# Altium PCB 2018_CARTE_SENSORS.PCBDOC
Units mil, origin at the board's own origin, x right, y up, seen from the top; angles counter-clockwise.
Board outline 6889.76 x 1181.1 mil, 4 copper layers (1-TOP, 2-GND, 3-SIGNAL, 4-BOTTOM); 85 components, 74 nets, 293 pads, 95 vias.
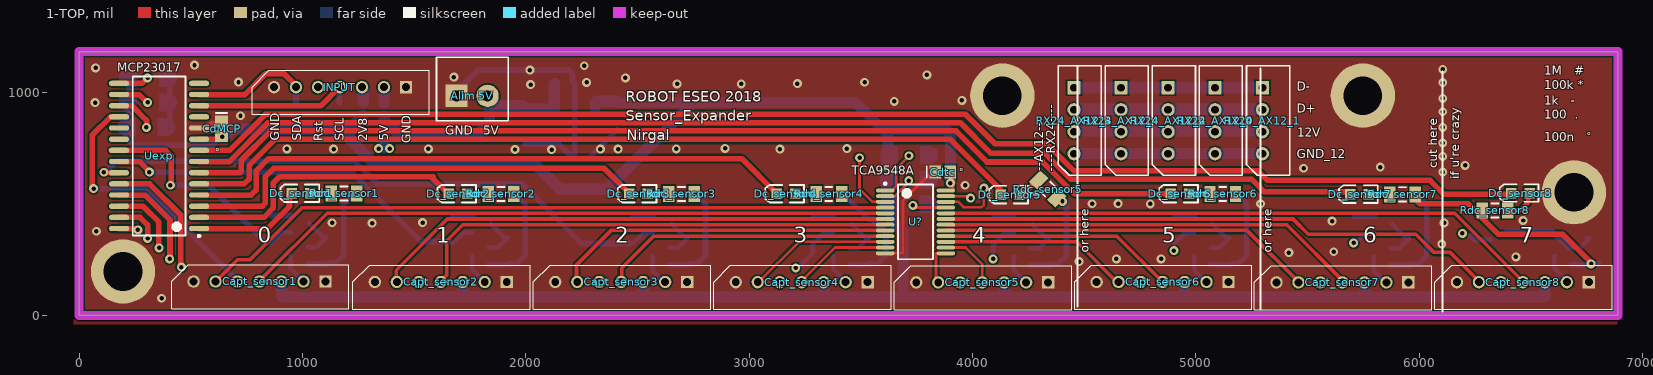
[diagram p0: 1-TOP view]
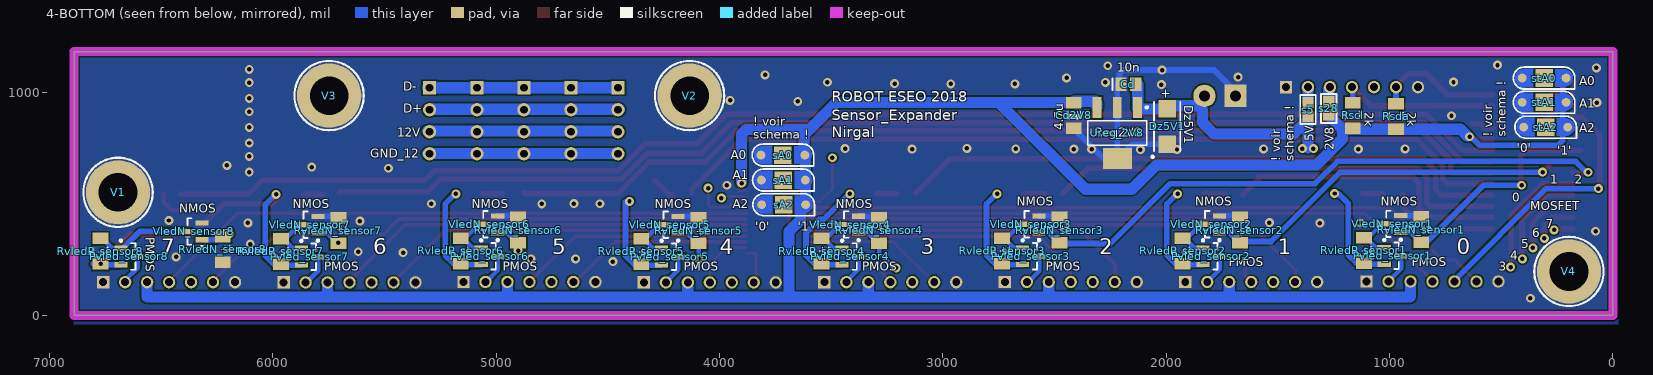
[diagram p1: 4-BOTTOM view, seen from below]
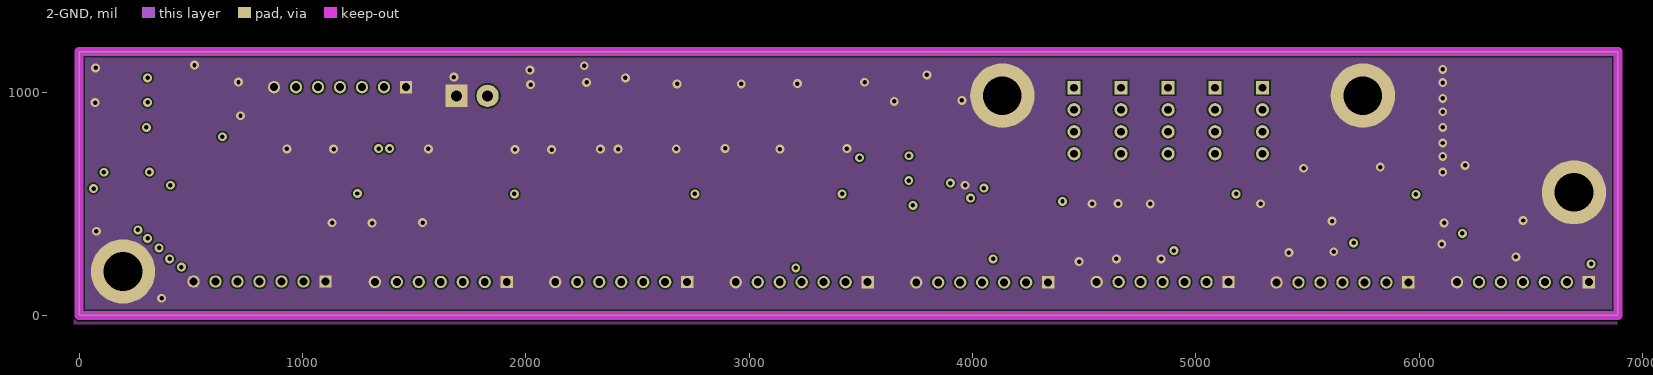
[diagram p2: 2-GND]
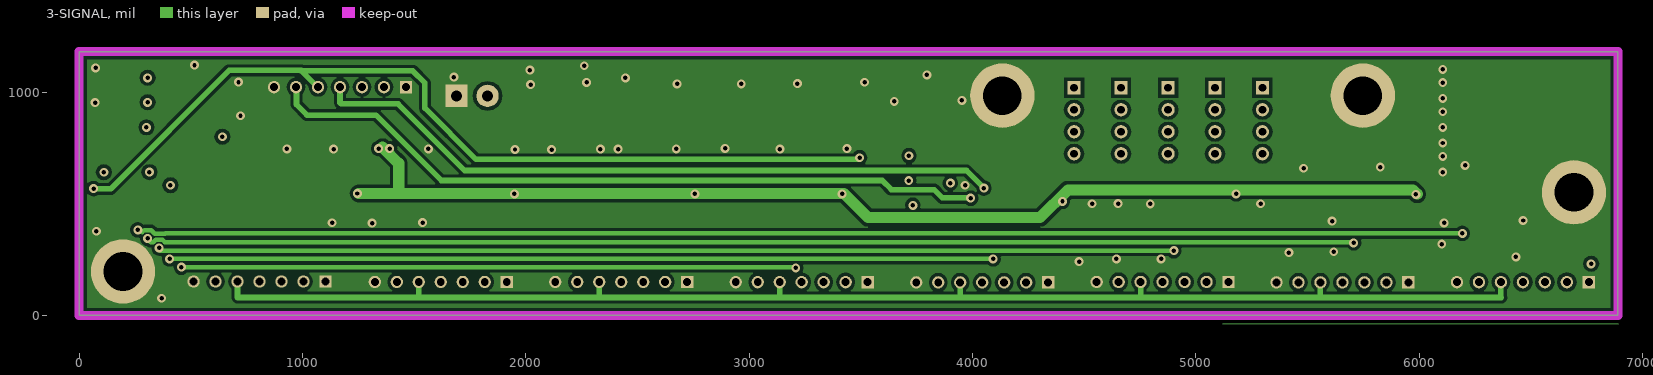
[diagram p3: 3-SIGNAL]
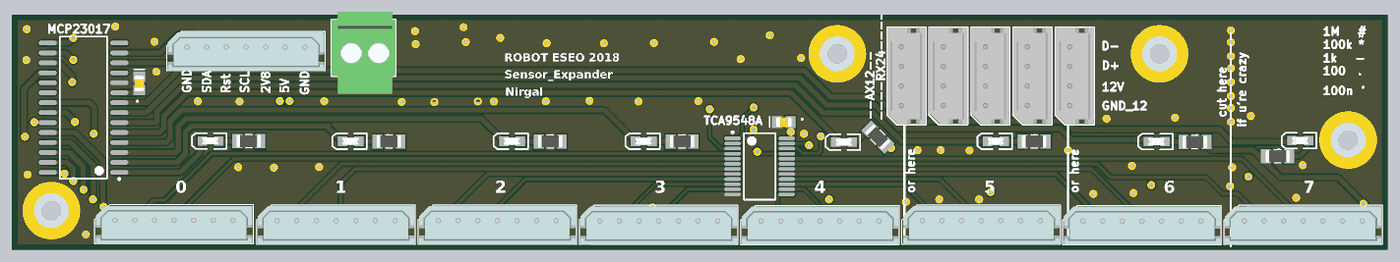
[diagram p4: 3D render of the assembled board from above, using the file's embedded part models]
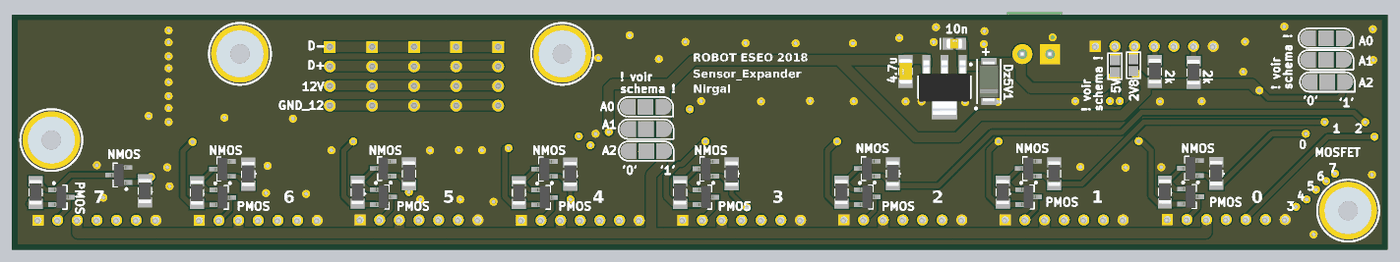
[diagram p5: 3D render of the assembled board from below, using the file's embedded part models]

## Layer stack, top to bottom
Top Solder: solder mask 0.4, Solder Resist, Dk 3.5
1-TOP: signal copper 1.4
Dielectric1: prepreg 12.6, FR-4, Dk 4.8
2-GND: signal copper 1.4
Dielectric2: core 12.6, FR-4, Dk 4.8
3-SIGNAL: signal copper 1.4
Dielectric3: prepreg 12.6, FR-4, Dk 4.8
4-BOTTOM: signal copper 1.4
Bottom Solder: solder mask 0.4, Solder Resist, Dk 3.5

## Board outline
0,0 0,1181.1 6889.76,1181.1 6889.76,0

## Design rules (kind name [scope] priority, off if disabled: settings)
Clearance Clearance_1 [InNamedPolygon('4-BOTTOM') Or  InNamedPolygon('2-SIGNAL') Or  InNamedPolygon('2-24V') Or  InNamedPolygon('3-TOP') Or  InNamedPolygon('3-GND')] p1: gap=15
Clearance [All] p2: gap=7
FabricationTestPointUsage TestPointUsage [All] p1: valid=0 allowmultiple=FALSE
FabricationTestpoint Testpoint [All] p1: side=3 testpointundercomponent=TRUE minsize=40 maxsize=100 preferedsize=60 minholesize=0 maxholesize=40 preferedholesize=32 testpointgrid=1 allowsidetop=TRUE allowsidebottom=TRUE usegrid=TRUE gridtolerance=0.01
PlaneClearance [All] p1: clearance=10
PlaneConnect [All] p1: planeconnectstyle=Direct reliefexpansion=25 reliefentries=4 reliefconductorwidth=12 reliefairgap=15
PolygonConnect [All] p1: connectstyle=Direct reliefconductorwidth=10 reliefentries=4 polygonreliefangle="90 Angle" airgapwidth=10
RoomDefinition sensor8 [InComponentClass('sensor8')] p1: confinementstyle=ConfineIn formatcopy=TRUE lockcomponents=FALSE outline 6063.61,594 6063.61,21 6869.61,21 6869.61,594
RoomDefinition sensor7 [InComponentClass('sensor7')] p2: confinementstyle=ConfineIn formatcopy=TRUE lockcomponents=FALSE outline 5255.61,593 5255.61,20 6061.61,20 6061.61,593
RoomDefinition sensor6 [InComponentClass('sensor6')] p3: confinementstyle=ConfineIn formatcopy=TRUE lockcomponents=FALSE outline 4450.61,595 4450.61,22 5256.61,22 5256.61,595
RoomDefinition sensor5 [InComponentClass('sensor5')] p4: confinementstyle=ConfineIn formatcopy=TRUE lockcomponents=FALSE outline 3642.76,593 3642.76,20 4448.76,20 4448.76,593
RoomDefinition sensor4 [InComponentClass('sensor4')] p5: confinementstyle=ConfineIn formatcopy=TRUE lockcomponents=FALSE outline 2834.61,594 2834.61,21 3640.61,21 3640.61,594
RoomDefinition sensor3 [InComponentClass('sensor3')] p6: confinementstyle=ConfineIn formatcopy=TRUE lockcomponents=FALSE outline 2026.61,595 2026.61,22 2832.61,22 2832.61,595
RoomDefinition sensor2 [InComponentClass('sensor2')] p7: confinementstyle=ConfineIn formatcopy=TRUE lockcomponents=FALSE outline 1218.61,595 1218.61,22 2024.61,22 2024.61,595
RoomDefinition sensor1 [InComponentClass('sensor1')] p8: confinementstyle=ConfineIn formatcopy=TRUE lockcomponents=FALSE outline 407,597 407,24 1213,24 1213,597
RoomDefinition 2018_CARTE_SENSORS [InComponentClass('2018_CARTE_SENSORS')] p9: confinementstyle=ConfineIn formatcopy=TRUE lockcomponents=FALSE outline 7842.14,4998 7401,4998 7401,4948.02 7842.14,4948.02
RoutingLayers RoutingLayers_1 [All] p1: top layer_v5=TRUE mid layer 1_v5=FALSE mid layer 2_v5=FALSE bottom layer_v5=TRUE
RoutingLayers [All] p2: top layer_v5=TRUE mid layer 1_v5=FALSE mid layer 2_v5=FALSE bottom layer_v5=TRUE
RoutingVias [All] p1: holewidth=28 width=50 viastyle="Through Hole" minholewidth=28 minwidth=50 maxholewidth=28 maxwidth=50
SilkToSolderMaskClearance SilkscreenOverComponentPads [IsPad] p1: minsilkscreentomaskgap=10 clearancetoexposedcopper=TRUE
SolderMaskExpansion [All] p1: expansion=0
Width [All] p1: maxlimit=300 minlimit=5 preferedwidth=20
23 further rules are at their usual default settings.

## Classes and differential pairs
channel class sensor: sensor1 sensor2 sensor3 sensor4 sensor5 sensor6 sensor7 sensor8
net class SDA[1..8]: SDA1 SDA2 SDA3 SDA4 SDA5 SDA6 SDA7 SDA8
net class SCL[1..8]: SCL1 SCL2 SCL3 SCL4 SCL5 SCL6 SCL7 SCL8
net class MOSLED[1..8]: MOSLED1 MOSLED2 MOSLED3 MOSLED4 MOSLED5 MOSLED6 MOSLED7 MOSLED8
net class LED[1..8]: LED1 LED2 LED3 LED4 LED5 LED6 LED7 LED8
component class sensor8: Capt_sensor8 Dc_sensor8 Pvled_sensor8 Rdc_sensor8 RvledN_sensor8 RvledP_sensor8 VledN_sensor8
component class sensor7: Capt_sensor7 Dc_sensor7 Pvled_sensor7 Rdc_sensor7 RvledN_sensor7 RvledP_sensor7 VledN_sensor7
component class sensor6: Capt_sensor6 Dc_sensor6 Pvled_sensor6 Rdc_sensor6 RvledN_sensor6 RvledP_sensor6 VledN_sensor6
component class sensor5: Capt_sensor5 Dc_sensor5 Pvled_sensor5 Rdc_sensor5 RvledN_sensor5 RvledP_sensor5 VledN_sensor5
component class sensor4: Capt_sensor4 Dc_sensor4 Pvled_sensor4 Rdc_sensor4 RvledN_sensor4 RvledP_sensor4 VledN_sensor4
component class sensor3: Capt_sensor3 Dc_sensor3 Pvled_sensor3 Rdc_sensor3 RvledN_sensor3 RvledP_sensor3 VledN_sensor3
component class sensor2: Capt_sensor2 Dc_sensor2 Pvled_sensor2 Rdc_sensor2 RvledN_sensor2 RvledP_sensor2 VledN_sensor2
component class sensor1: Capt_sensor1 Dc_sensor1 Pvled_sensor1 Rdc_sensor1 RvledN_sensor1 RvledP_sensor1 VledN_sensor1
component class 2018_CARTE_SENSORS: "Alim 5V" Cd Cd2V8 CdMCP Cdtc Dz5V1 INPUT Rscl Rsda RX24_AX12_0 RX24_AX12_1 RX24_AX12_2 RX24_AX12_3 RX24_AX12_4 s5 s28 sA0 sA1 sA2 stA0 stA1 stA2 U? Uexp Ureg_2V8 V1 V2 V3 V4

## Components (designator, comment, footprint, x,y, rotation, side; value= is the part's Value field where it differs from the comment)
"Alim 5V" "BORNIER_2V_3.5MM" BORNIER_2V_3.5MM 1691,983 r0 top
Capt_sensor1 "BARRETTE7" MOLEX7_2.50MM 807.66,152 r0 top (schematic designator Capt)
Capt_sensor2 "BARRETTE7" MOLEX7_2.50MM 1619.28,150 r0 top (schematic designator Capt)
Capt_sensor3 "BARRETTE7" MOLEX7_2.50MM 2427.28,150 r0 top (schematic designator Capt)
Capt_sensor4 "BARRETTE7" MOLEX7_2.50MM 3235.28,149 r0 top (schematic designator Capt)
Capt_sensor5 "BARRETTE7" MOLEX7_2.50MM 4043.42,148 r0 top (schematic designator Capt)
Capt_sensor6 "BARRETTE7" MOLEX7_2.50MM 4851.28,150 r0 top (schematic designator Capt)
Capt_sensor7 "BARRETTE7" MOLEX7_2.50MM 5656.28,148 r0 top (schematic designator Capt)
Capt_sensor8 "BARRETTE7" MOLEX7_2.50MM 6464.28,149 r0 top (schematic designator Capt)
Cd "10nF" C0805_N 2169,1035 r180 bottom
Cd2V8 "4.7u" C1206_N 2414,896 r90 bottom
CdMCP "100nF" C0805_N 638,836 r270 top
Cdtc "100nF" C0805_N 3866,642 r0 top
Dc_sensor1 "LED" LED_0805 994,547 r180 top (schematic designator Dc)
Dc_sensor2 "LED" LED_0805 1696.61,545 r180 top (schematic designator Dc)
Dc_sensor3 "LED" LED_0805 2504.61,545 r180 top (schematic designator Dc)
Dc_sensor4 "LED" LED_0805 3164.61,545 r180 top (schematic designator Dc)
Dc_sensor5 "LED" LED_0805 4167.76,541 r180 top (schematic designator Dc)
Dc_sensor6 "LED" LED_0805 4928.61,545 r180 top (schematic designator Dc)
Dc_sensor7 "LED" LED_0805 5733.61,543 r180 top (schematic designator Dc)
Dc_sensor8 "LED" LED_0805 6453,548 r180 top (schematic designator Dc)
Dz5V1 "Diode Zener" "SMA Diode" 1996,846 r90 bottom
INPUT "BARRETTE7" MOLEX7_2.50MM 1168,1022 r0 top
Pvled_sensor1 "MOSP" SOT23-3N 986,267 r180 bottom (schematic designator Pvled)
Pvled_sensor2 "MOSP" SOT23-3N 1797.61,265 r180 bottom (schematic designator Pvled)
Pvled_sensor3 "MOSP" SOT23-3N 2605.61,265 r180 bottom (schematic designator Pvled)
Pvled_sensor4 "MOSP" SOT23-3N 3413.61,264 r180 bottom (schematic designator Pvled)
Pvled_sensor5 "MOSP" SOT23-3N 4221.76,263 r180 bottom (schematic designator Pvled)
Pvled_sensor6 "MOSP" SOT23-3N 5029.61,265 r180 bottom (schematic designator Pvled)
Pvled_sensor7 "MOSP" SOT23-3N 5834.61,263 r180 bottom (schematic designator Pvled)
Pvled_sensor8 "MOSP" SOT23-3N 6642.61,264 r180 bottom (schematic designator Pvled)
Rdc_sensor1 "1k" R1206_N 1186,546 r180 top (schematic designator Rdc)
Rdc_sensor2 "1k" R1206_N 1888.61,544 r180 top (schematic designator Rdc)
Rdc_sensor3 "1k" R1206_N 2696.61,544 r180 top (schematic designator Rdc)
Rdc_sensor4 "1k" R1206_N 3356.61,544 r180 top (schematic designator Rdc)
Rdc_sensor5 "1k" R1206_N 4337,566 r135 top (schematic designator Rdc)
Rdc_sensor6 "1k" R1206_N 5120.61,544 r180 top (schematic designator Rdc)
Rdc_sensor7 "1k" R1206_N 5925.61,542 r180 top (schematic designator Rdc)
Rdc_sensor8 "1k" R1206_N 6339,470 r0 top (schematic designator Rdc)
Rscl "2k" R1206_N 1165,896 r90 bottom
Rsda "2k" R1206_N 971,891 r90 bottom
RvledN_sensor1 "10k" R1206_N 858,384 r90 bottom (schematic designator RvledN)
RvledN_sensor2 "10k" R1206_N 1669.61,382 r90 bottom (schematic designator RvledN)
RvledN_sensor3 "10k" R1206_N 2477.61,382 r90 bottom (schematic designator RvledN)
RvledN_sensor4 "10k" R1206_N 3285.61,381 r90 bottom (schematic designator RvledN)
RvledN_sensor5 "10k" R1206_N 4093.76,380 r90 bottom (schematic designator RvledN)
RvledN_sensor6 "10k" R1206_N 4901.61,382 r90 bottom (schematic designator RvledN)
RvledN_sensor7 "10k" R1206_N 5706.61,380 r90 bottom (schematic designator RvledN)
RvledN_sensor8 "10k" R1206_N 6224,296 r270 bottom (schematic designator RvledN)
RvledP_sensor1 "10k" R1206_N 1115,291 r90 bottom (schematic designator RvledP)
RvledP_sensor2 "10k" R1206_N 1926.61,289 r90 bottom (schematic designator RvledP)
RvledP_sensor3 "10k" R1206_N 2734.61,289 r90 bottom (schematic designator RvledP)
RvledP_sensor4 "10k" R1206_N 3542.61,288 r90 bottom (schematic designator RvledP)
RvledP_sensor5 "10k" R1206_N 4350.76,287 r90 bottom (schematic designator RvledP)
RvledP_sensor6 "10k" R1206_N 5158.61,289 r90 bottom (schematic designator RvledP)
RvledP_sensor7 "10k" R1206_N 5963.61,287 r90 bottom (schematic designator RvledP)
RvledP_sensor8 "10k" R1206_N 6771.61,288 r90 bottom (schematic designator RvledP)
RX24_AX12_0 "MOLEX 22-03-5045" MOLEX4_2.5MM 5086,723.98 r90 top
RX24_AX12_1 "MOLEX 22-03-5045" MOLEX4_2.5MM 5298,723.98 r90 top
RX24_AX12_2 "MOLEX 22-03-5045" MOLEX4_2.5MM 4876,723.98 r90 top
RX24_AX12_3 "MOLEX 22-03-5045" MOLEX4_2.5MM 4455,723.98 r90 top
RX24_AX12_4 "MOLEX 22-03-5045" MOLEX4_2.5MM 4665,723.98 r90 top
s5 "Goutte Strap_2" "Goutte Strap_2 Pads_Clearance 0.254mm" 1365,892 r90 bottom
s28 "Goutte Strap_2" "Goutte Strap_2 Pads_Clearance 0.254mm" 1272,897 r90 bottom
sA0 "Goutte Strap_3" "Goutte Strap_3 PADS" 3716,718 r0 bottom
sA1 "Goutte Strap_3" "Goutte Strap_3 PADS" 3714,606 r0 bottom
sA2 "Goutte Strap_3" "Goutte Strap_3 PADS" 3713,496 r0 bottom
stA0 "Goutte Strap_3" "Goutte Strap_3 PADS" 308,1063 r0 bottom
stA1 "Goutte Strap_3" "Goutte Strap_3 PADS" 308,954 r0 bottom
stA2 "Goutte Strap_3" "Goutte Strap_3 PADS" 301,843 r0 bottom
U? "TCA9548A" DB24_N 3745,419 r0 top
Uexp "MCP23017-E/SO" SOIC-SO28_N 358,714 r180 top
Ureg_2V8 "TLV1117LV28DCYR" SOT223-4N 2219,817 r270 bottom
V1 "Entretoise WURTH CMS" ENTRETOISE_CMS 6692.91,551.18 r180 bottom
V2 "Entretoise WURTH CMS" ENTRETOISE_CMS 4133.86,984.25 r180 bottom
V3 "Entretoise WURTH CMS" ENTRETOISE_CMS 5748.03,984.25 r180 bottom
V4 "Entretoise WURTH CMS" ENTRETOISE_CMS 196.85,196.85 r180 bottom
VledN_sensor1 "MOSN" SOT23-3N 987,410 r0 bottom (schematic designator VledN)
VledN_sensor2 "MOSN" SOT23-3N 1798.61,408 r0 bottom (schematic designator VledN)
VledN_sensor3 "MOSN" SOT23-3N 2606.61,408 r0 bottom (schematic designator VledN)
VledN_sensor4 "MOSN" SOT23-3N 3414.61,407 r0 bottom (schematic designator VledN)
VledN_sensor5 "MOSN" SOT23-3N 4222.76,406 r0 bottom (schematic designator VledN)
VledN_sensor6 "MOSN" SOT23-3N 5030.61,408 r0 bottom (schematic designator VledN)
VledN_sensor7 "MOSN" SOT23-3N 5835.61,406 r0 bottom (schematic designator VledN)
VledN_sensor8 "MOSN" SOT23-3N 6355,376 r0 bottom (schematic designator VledN)

## Footprints (in the part's own frame and the unit in brackets; to place one, negate y for a bottom-side part, rotate by r counter-clockwise, add the part's x,y. Pads: shape width x height; smd on the part's side, far side on the other; paste and mask are expansions set on the pad)
BORNIER_2V_3.5MM [mm]
  rect 2.54x2.54 hole 1.25: 1(-0.025,0)
  round 2.54 hole 1.25: 2(3.5,0)
  silkscreen extent -2.31,-2.82 5.84,4.39, body extent -2.27,-5.08 5.83,5.32, height 21.81
C0805_N [mm] "Chip Capacitor, Body 2.0x1.3mm, IPC Medium Density"
  rect 1.3x1.5 smd: 1(-0.85,0) 2(0.85,0)
  silkscreen extent -1.8,-0.65 -1.8,0.65, body extent -0.99,-0.63 1.01,0.63, height 0.8
C1206_N [mm] "Chip Capacitor, Body 3.2x1.6mm, IPC Medium Density"
  rect 1.3x1.8 smd: 1(-1.45,0) 2(1.45,0)
  silkscreen extent -0.4,-0.8 0.4,0.8, body extent -1.57,-0.81 1.63,0.79, height 1.02
DB24_N [mm] "SOP, 24-Leads, Body 8.2x5.3mm, Pitch 0.65mm, IPC Medium Density"
  oval 2.1x0.45 smd: 1(-3.45,3.575) 2(-3.45,2.925) 3(-3.45,2.275) 4(-3.45,1.625) 5(-3.45,0.975) 6(-3.45,0.325) 7(-3.45,-0.325) 8(-3.45,-0.975) 9(-3.45,-1.625) 10(-3.45,-2.275) 11(-3.45,-2.925) 12(-3.45,-3.575) 13(3.45,-3.575) 14(3.45,-2.925) 15(3.45,-2.275) 16(3.45,-1.625) 17(3.45,-0.975) 18(3.45,-0.325) 19(3.45,0.325) 20(3.45,0.975) 21(3.45,1.625) 22(3.45,2.275) 23(3.45,2.925) 24(3.45,3.575)
  silkscreen extent -3.57,-4.25 2,4.47, body extent -2.8,-4.25 2.8,4.25, height 2
ENTRETOISE_CMS [mil] "Entretoise CMS Wurth trou 4.4mm"
  round 288 hole 173.23: 1(0,0)
  silkscreen extent -155,-155 155,155, body extent -118,-118 118,117, height 118
"Goutte Strap_2 Pads_Clearance 0.254mm" [mil] "Goutte Strap_2 Pads_Clearance 0.254mm"
  rect 50x50 smd mask+7.87: 1(0,0) 2(60,0)
  silkscreen extent -35,-35 95,35
"Goutte Strap_3 PADS" [mm] "3 Pads CMS Goutte Strap"
  round 1 smd: 1(-2.5,0) 3(2.5,0)
  rect 2x2 smd: 2(0,0)
  1-TOP region: -1.286,-1 -2.286,-1 -2.669,-0.924 -2.993,-0.707 -3.21,-0.383 -3.286,0 -3.286,0 -3.21,0.383 -2.993,0.707 -2.669,0.924 -2.286,1 -2.286,1 -1.286,1
  1-TOP region: 1.289,1 2.289,1 2.672,0.924 2.996,0.707 3.213,0.383 3.289,0 3.289,0 3.213,-0.383 2.996,-0.707 2.672,-0.924 2.289,-1 2.289,-1 1.289,-1
  silkscreen extent -3.5,-1.25 3.5,1.25
LED_0805 [mm] "SM LED; 2 Flat Leads"
  rect 1.2x1.2 smd: 1(-1.05,0) 2(1.05,0)
  silkscreen extent -2.05,-1 2.35,1, body extent -1.05,-0.64 1.06,0.64, height 1.2
MOLEX4_2.5MM [mm] "Ref Molex : 22-03-5045 - 4 voies - 2.5mm"
  rect 1.5x1.5 hole 0.9: 1(7.5,0)
  round 1.5 hole 0.9: 2(5,0) 3(2.5,0) 4(0,0)
  silkscreen extent -2.45,-3.1 10,1.8, body extent -2.44,-3.07 9.96,1.83, height 5.92
MOLEX7_2.50MM [mm] "7 pins, straight"
  rect 1.4x1.4 hole 0.9: 1(7.5,0)
  round 1.4 hole 0.9: 2(5,0) 3(2.5,0) 4(0,0) 5(-2.5,0) 6(-5,0) 7(-7.5,0)
  silkscreen extent -10,-3.1 10.16,1.9, body extent -9.85,-3.15 10.05,1.75, height 5.95
R1206_N [mm] "Chip Resistor, Body 3.2x1.6mm, IPC Medium Density"
  rect 1.3x1.8 smd: 1(-1.45,0) 2(1.45,0)
  silkscreen extent -0.4,-0.8 0.4,0.8, body extent -1.68,-0.87 1.68,0.87, height 0.71
"SMA Diode" [mm] "Case 403D-02"
  rect 2x2 smd: 1(-2,0) 2(2,0)
  silkscreen extent -3.57,-1.5 2.8,1.78, body extent -2.8,-1.46 2.79,1.46, height 2.41
SOIC-SO28_N [mm] "SOIC, 28-Leads, Body 17.9x7.5mm, Pitch 1.27mm, IPC Medium Density"
  oval 2.3x0.6 smd: 1(-4.55,8.255) 2(-4.55,6.985) 3(-4.55,5.715) 4(-4.55,4.445) 5(-4.55,3.175) 6(-4.55,1.905) 7(-4.55,0.635) 8(-4.55,-0.635) 9(-4.55,-1.905) 10(-4.55,-3.175) 11(-4.55,-4.445) 12(-4.55,-5.715) 13(-4.55,-6.985) 14(-4.55,-8.255) 15(4.55,-8.255) 16(4.55,-6.985) 17(4.55,-5.715) 18(4.55,-4.445) 19(4.55,-3.175) 20(4.55,-1.905) 21(4.55,-0.635) 22(4.55,0.635) 23(4.55,1.905) 24(4.55,3.175) 25(4.55,4.445) 26(4.55,5.715) 27(4.55,6.985) 28(4.55,8.255)
  silkscreen extent -4.67,-9.05 3,9.23, body extent -3.8,-9.05 3.8,9.05, height 2.65
SOT23-3N [mm] "SOT23, 3-Leads, Body 2.9x1.3mm, Pitch 0.95mm, Lead Span 2.5mm, IPC Medium Density"
  rect 1.5x0.6 smd: 1(-0.95,0.95) 2(-0.95,-0.95) 3(0.95,0)
  silkscreen extent -1.07,-1.5 0.7,1.92, body extent -1.24,-1.5 1.23,1.5, height 1.1
SOT223-4N [mm] "SOT223/SC73, 4-Leads, Body 6.5x3.5mm, Pitch 2.3mm, Lead Span 7mm, IPC Medium Density"
  rect 2.4x1 smd: 1(-2.9,2.3) 2(-2.9,0) 3(-2.9,-2.3)
  rect 2.4x3.3 smd: 4(2.9,0)
  silkscreen extent -3.02,-3.35 1.4,3.47, body extent -3.39,-3.35 3.5,3.35, height 1.8

## Part data
Capt_sensor1 Capt_sensor2 Capt_sensor3 Capt_sensor4 Capt_sensor5 Capt_sensor6 Capt_sensor7 Capt_sensor8 INPUT: "Header, 6-Pin"
Cd CdMCP Cdtc: library part Condensateur, "Capacitor"
Cd2V8: library part Capacitor, "Capacitor"
Dc_sensor1 Dc_sensor2 Dc_sensor3 Dc_sensor4 Dc_sensor5 Dc_sensor6 Dc_sensor7 Dc_sensor8: "Typical LED"
Dz5V1: "Zener Diode"
Pvled_sensor1 Pvled_sensor2 Pvled_sensor3 Pvled_sensor4 Pvled_sensor5 Pvled_sensor6 Pvled_sensor7 Pvled_sensor8: library part "Transistor MOSFET-P", "P-Channel MOSFET"
Rdc_sensor1 Rdc_sensor2 Rdc_sensor3 Rdc_sensor4 Rdc_sensor5 Rdc_sensor6 Rdc_sensor7 Rdc_sensor8 Rscl Rsda RvledN_sensor1 RvledN_sensor2 RvledN_sensor3 RvledN_sensor4 RvledN_sensor5 RvledN_sensor6 RvledN_sensor7 RvledN_sensor8 RvledP_sensor1 RvledP_sensor2 RvledP_sensor3 RvledP_sensor4 RvledP_sensor5 RvledP_sensor6 RvledP_sensor7 RvledP_sensor8: library part Resistor, "Resistor"
RX24_AX12_0 RX24_AX12_1 RX24_AX12_2 RX24_AX12_3 RX24_AX12_4: library part BARRETTE4, "Header, 4-Pin"
U?: library part PCA9548ADB, "8-Channel I2C Switch with Reset, 2.3 to 5.5 V, -40 to 85 degC, 24-pin SSOP (DB), Green (RoHS & no Sb/Br)"
Uexp: "16-Bit I/O Expander with Serial Interface, 28-Pin SOIC, Extended Temperature"
Ureg_2V8: library part MCP1826S-3302E/DB, "1000 mA, Low Voltage, Low Quiescent Current LDO Regulator, 3-Pin SOT-223, Extended Temperature"
V1 V2 V3 V4: "Entretoise Wurth"
VledN_sensor1 VledN_sensor2 VledN_sensor3 VledN_sensor4 VledN_sensor5 VledN_sensor6 VledN_sensor7 VledN_sensor8: library part "Transistor MOSFET-N", "N-Channel MOSFET"

## Via types
v1: diameter 40, hole 20, 1-TOP to 4-BOTTOM, 95 vias

## Nets (pads, with @x,y where several pads share a name; then routed paths per layer and width w, separated by ;. In a path a pad name is that pad's centre, name@x,y a point inside that pad or via, vN(x,y) a via of type N, cw(c..) or ccw(c..) an arc to the next point about the centre after c; other vN are vias at no path point)
2V8: Capt_sensor1.3 Capt_sensor2.3 Capt_sensor3.3 Capt_sensor4.3 Capt_sensor5.3 Capt_sensor6.3 Capt_sensor7.3 Capt_sensor8.3 Cd2V8.2 CdMCP.2 Cdtc.2 Rscl.1 Rsda.1 s28.1 sA0.1 sA1.1 sA2.1 stA0.1 stA1.1 stA2.1 U?.24 Uexp.9 Ureg_2V8.3 | length 12248.5
  1-TOP w12: U?.24 3913.75,559.75 3914,560 Cdtc.2@3914,629
  1-TOP w25: Uexp.9 625,789 CdMCP.2@636,800
  4-BOTTOM w25: 225,1078 225,782 245,762 597,762 v1@632,797
  4-BOTTOM w50: v1@652,804 681.91,833.91 Rsda.1 1210.91,833.91 ; 906.09,85.91 Capt_sensor1.3 ; 908.09,82.91 3333.7,82.91 ; s28.1@1271,894 1210.91,833.91 ; 1717.7,83.91 Capt_sensor2.3 ; Ureg_2V8.3 2309.55,950.55 2318,959 Cd2V8.2@2413,959 ; Cd2V8.2 3475.91,953.09 3597,832 ; 2525.7,83.91 Capt_sensor3.3 ; 2744,947 2362,565 2153,565 2044,674 1328,674 1210.91,791.09 1210.91,833.91 ; Capt_sensor4.3 3333.7,82.91 ; sA2.1 sA0.1@3614.57,719.57 ; sA0.1@3622,715 3622,807 3597,832 ; 3637,479 3637,428 3688.59,376.41 3688.59,122.92 3689,122.51 3689,87 ; v1@3902,597 3902,811 3881,832 3597,832 ; Capt_sensor5.3 4141.85,82.91 ; 4949.7,83.91 Capt_sensor6.3 ; Capt_sensor7.3 5754.7,82.91 ; Capt_sensor8.3 6562.7,82.91 5754.7,82.91 ; 3333.7,82.91 4141.85,82.91 ; 4141.85,82.91 5754.7,82.91
  other v1: 3900.61,592 641.61,800
5V: "Alim 5V.2" Cd.2 Dz5V1.2 Pvled_sensor1.2 Pvled_sensor2.2 Pvled_sensor3.2 Pvled_sensor4.2 Pvled_sensor5.2 Pvled_sensor6.2 Pvled_sensor7.2 Pvled_sensor8.2 Rdc_sensor1.1 Rdc_sensor2.1 Rdc_sensor3.1 Rdc_sensor4.1 Rdc_sensor5.1 Rdc_sensor6.1 Rdc_sensor7.1 Rdc_sensor8.1 RvledP_sensor1.1 RvledP_sensor2.1 RvledP_sensor3.1 RvledP_sensor4.1 RvledP_sensor5.1 RvledP_sensor6.1 RvledP_sensor7.1 RvledP_sensor8.1 s5.1 Ureg_2V8.1 | length 10566.9
  1-TOP w25: Rdc_sensor7.1@5974,531 6005,500 6218,500 6355,363 6643,363 v1@6764,242
  3-SIGNAL w50: v1@1252,546 1431,546 ; v1@1359,753 1431,681 1431,546 ; v1@3424,546 1431,546 ; v1@3426,544 3532,438 4303,438 4427,562 5972,562 v1@5991,543
  4-BOTTOM w25: Pvled_sensor1.2 1108.4,229.6 RvledP_sensor1.1@1110,228 ; RvledP_sensor1.1 1147.91,233.91 1185,271 1185,501 1229,545 v1@1243,545 ; Pvled_sensor2.2 RvledP_sensor2.1@1924.21,227.6 ; RvledP_sensor2.1 1959.53,231.91 1996.61,269 1996.61,499 v1@1951.61,544 ; Pvled_sensor3.2 RvledP_sensor3.1@2732.21,227.6 ; RvledP_sensor3.1 2767.53,231.91 2804.61,269 2804.61,499 v1@2759.61,544 ; v1@3418,546 3534,430 3553,430 3612.61,370.39 3612.61,268 3575.53,230.91 RvledP_sensor4.1 ; Pvled_sensor4.2 RvledP_sensor4.1@3540.21,226.6 ; Pvled_sensor5.2 RvledP_sensor5.1@4348.36,225.6 ; RvledP_sensor5.1 4383.68,229.91 4420.76,267 v1@4420.76,509 ; Pvled_sensor6.2 RvledP_sensor6.1@5156.21,227.6 ; RvledP_sensor6.1 5191.53,231.91 5228.61,269 5228.61,499 v1@5183.61,544 ; Pvled_sensor7.2 RvledP_sensor7.1@5961.21,225.6 ; RvledP_sensor7.1 5996.53,229.91 6033.61,267 6033.61,497 v1@5988.61,542 ; Pvled_sensor8.2 RvledP_sensor8.1@6769.21,226.6 ; RvledP_sensor8.1 RvledP_sensor8.1@6804.53,230.91
  4-BOTTOM w50: 1365,750 s5.1@1365,876 ; s5.1 s5.1@1365,876 ; Dz5V1.2 2127.26,924.74 2127.26,1034.26 Cd.2@2131,1038 ; Dz5V1.2@2004,923 1988,939 1856,939 1837,920 1837,864 1785,812 1429,812 s5.1@1365,876
  other v1: 6769.61,231 4403,511 5985.61,542 1948.61,544 2756.61,544 3416.61,544 5180.61,544 1246,546 1341,747 1390,747
12V: RX24_AX12_0.3 RX24_AX12_1.3 RX24_AX12_2.3 RX24_AX12_3.3 RX24_AX12_4.3 | length 851.3
  4-BOTTOM w50: RX24_AX12_3.3@4456,826.26 4666,826.26 4877,826.26 5087,826.26 5299,826.26 RX24_AX12_1.3@5307.26,826.26
CAPTRST_sensor1: Capt_sensor1.5 Capt_sensor2.5 Capt_sensor3.5 Capt_sensor4.5 Capt_sensor5.5 Capt_sensor6.5 Capt_sensor7.5 Capt_sensor8.5 INPUT.5 U?.3 Uexp.18 | length 11694.1
  1-TOP w12: v1@3494,705 3494,566 3551.43,508.57 U?.3
  1-TOP w25: v1@59,571 59,808 140,889 Uexp.18
  3-SIGNAL w25: v1@64,567 142,567 672,1097 994,1097 1065.76,1025.24 INPUT.5@1068.24,1025.24 ; Capt_sensor1.5 709.24,80.24 1520.85,80.24 ; 993,1095 1494,1095 1548,1041 1548,928 1777,699 3493,699 v1@3501,707 ; Capt_sensor2.5 1520.85,80.24 ; Capt_sensor3.5 2328.85,80.24 ; Capt_sensor4.5 3136.85,80.24 ; Capt_sensor5.5 3945,80.24 ; Capt_sensor6.5 4752.85,80.24 ; Capt_sensor7.5 5557.85,80.24 ; Capt_sensor8.5 6365.85,80.24 ; 6367.76,80.24 6365.85,80.24 ; 1520.85,80.24 2328.85,80.24 ; 2328.85,80.24 3136.85,80.24 ; 3136.85,80.24 3945,80.24 ; 3945,80.24 4752.85,80.24 ; 4752.85,80.24 5557.85,80.24 ; 5557.85,80.24 6365.85,80.24
  4-BOTTOM w25: v1(65,568) 299,568 Capt_sensor1.5@712,155
  other v1: 3494.61,706
D+: RX24_AX12_0.2 RX24_AX12_1.2 RX24_AX12_2.2 RX24_AX12_3.2 RX24_AX12_4.2 | length 851.3
  4-BOTTOM w50: RX24_AX12_3.2@4449,923.26 4659,923.26 4870,923.26 5080,923.26 5292,923.26 RX24_AX12_1.2@5300.26,923.26
D-: RX24_AX12_0.1 RX24_AX12_1.1 RX24_AX12_2.1 RX24_AX12_3.1 RX24_AX12_4.1 | length 851.3
  4-BOTTOM w50: RX24_AX12_3.1 RX24_AX12_4.1 RX24_AX12_2.1 RX24_AX12_0.1 RX24_AX12_1.1 RX24_AX12_1.1@5306.26,1019.26
GND: "Alim 5V.1" Capt_sensor1.1 Capt_sensor1.7 Capt_sensor2.1 Capt_sensor2.7 Capt_sensor3.1 Capt_sensor3.7 Capt_sensor4.1 Capt_sensor4.7 Capt_sensor5.1 Capt_sensor5.7 Capt_sensor6.1 Capt_sensor6.7 Capt_sensor7.1 Capt_sensor7.7 Capt_sensor8.1 Capt_sensor8.7 Cd2V8.1 Cd.1 CdMCP.1 Cdtc.1 Dz5V1.1 INPUT.1 INPUT.7 RvledN_sensor1.2 RvledN_sensor2.2 RvledN_sensor3.2 RvledN_sensor4.2 RvledN_sensor5.2 RvledN_sensor6.2 RvledN_sensor7.2 RvledN_sensor8.2 sA0.3 sA1.3 sA2.3 stA0.3 stA1.3 stA2.3 U?.12 Uexp.10 Ureg_2V8.2 Ureg_2V8.4 V1.1 V2.1 V3.1 V4.1 VledN_sensor1.2 VledN_sensor2.2 VledN_sensor3.2 VledN_sensor4.2 VledN_sensor5.2 VledN_sensor6.2 VledN_sensor7.2 VledN_sensor8.2 | length 2960.2
  1-TOP w12: U?.12 3689.75,278.25 3689,279 3689,514 3802,627 Cdtc.1@3819,627
  1-TOP w25: Uexp.10 573,839 593,859 CdMCP.1@629,859
  4-BOTTOM w25: stA2.3@406.43,841.43 stA1.3 stA0.3 ; Capt_sensor1.7@512.39,146.61 Capt_sensor1.7 ; RvledN_sensor1.2@861.4,447.4 VledN_sensor1.2 ; Capt_sensor2.7@1324,144.61 Capt_sensor2.7 ; RvledN_sensor2.2@1673.02,445.4 VledN_sensor2.2 ; 1692,949 1692,1004 1787,1099 2192,1099 2209,1082 2209,1047 2219,1037 Ureg_2V8.2 Ureg_2V8.4 2280.83,702.83 Cd2V8.1@2409,831 ; Dz5V1.1 2147.74,767.26 Ureg_2V8.4@2210,705 ; Capt_sensor3.7@2132,144.61 Capt_sensor3.7 ; RvledN_sensor3.2@2481.02,445.4 VledN_sensor3.2 ; Capt_sensor4.7@2940,143.61 Capt_sensor4.7 ; RvledN_sensor4.2@3289.02,444.4 VledN_sensor4.2 ; Capt_sensor5.7@3748.15,142.61 Capt_sensor5.7 ; RvledN_sensor5.2@4097.16,443.4 VledN_sensor5.2 ; Capt_sensor6.7@4556,144.61 Capt_sensor6.7 ; RvledN_sensor6.2@4905.02,445.4 VledN_sensor6.2 ; Capt_sensor7.7@5361,142.61 Capt_sensor7.7 ; RvledN_sensor7.2@5710.02,443.4 VledN_sensor7.2 ; Capt_sensor8.7@6169,143.61 Capt_sensor8.7
  other v1: 369.61,77 4477.61,241 4644.61,253 4844.61,253 6432.61,262 5416.61,281 5617.61,285 6101,319 77.61,377 1312,413 6112,414 1133,415 1538,416 5610,422 6465,425 4796,499 4536,500 5290,500 4652,501 3966.61,583 6105.61,642 5482.61,659 5825.61,664 6205.61,672 6105.61,712 2115.61,742 1951.61,743 1139.61,745 2333.61,745 2413.61,745 3137.61,745 930.61,746 1563.61,746 2673.61,746 3437.61,747 2892.61,748 6105.61,772 6105.61,842 722.61,894 6105.61,912 71.61,953 3649.61,958 3952.61,963 6105.61,972 2021.61,1033 2677.61,1037 2964.61,1037 3215.61,1038 6105.61,1042 2272.61,1043 3516.61,1044 713.61,1045 2445.61,1064 1677.61,1067 3795.61,1077 2018.61,1098 6105.61,1102 73.61,1108 2261.61,1118 516.61,1121
GND_12: RX24_AX12_0.4 RX24_AX12_1.4 RX24_AX12_2.4 RX24_AX12_3.4 RX24_AX12_4.4 | length 851.3
  4-BOTTOM w50: RX24_AX12_3.4@4455,725.26 4665,725.26 4876,725.26 5086,725.26 5298,725.26 RX24_AX12_1.4@5306.26,725.26
I2C_SCL: INPUT.4 Rscl.2 U?.22 Uexp.12 | length 4103.7
  1-TOP w12: U?.22 3936.43,508.57 3960,485 4041,485 4051,495 v1@4051,574
  1-TOP w25: Uexp.12 1083,939 INPUT.4@1166,1022
  3-SIGNAL w25: INPUT.4@1168.24,1024 1168.24,952.24 1173.47,947 1428,947 1726,649 3973,649 v1@4051,571
  4-BOTTOM w25: Rscl.2 INPUT.4@1165,1018
  other v1: 4051,570
I2C_SDA: INPUT.6 Rsda.2 U?.23 Uexp.13 | length 3949.5
  1-TOP w12: U?.23 3978.84,534.16 v1@3990,523
  1-TOP w25: Uexp.13 742,989 835,1082 918,1082 INPUT.6@975,1025
  3-SIGNAL w25: INPUT.6@973.24,1016 973.24,944.24 1020.47,897 1329,897 1622,604 3596,604 3637,563 3828,563 3865,526 v1@3992,526
  4-BOTTOM w25: Rsda.2 INPUT.6@971,1020
  other v1: 3992,525
LED1: Dc_sensor1.2 Uexp.1 | length 495
  1-TOP w25: Uexp.1@540,389 843,389 942,488 Dc_sensor1.2@942,540
LED2: Dc_sensor2.2 Uexp.2 | length 1299.5
  1-TOP w25: Uexp.2@540,439 827,439 869,481 869,592 898,621 1576,621 ; 1586,621 1576,621 ; Dc_sensor2.2@1656,541 1576,621
LED3: Dc_sensor3.2 Uexp.3 | length 2113.2
  1-TOP w25: Uexp.3@540,489 820,489 833,502 833,620 872,659 2351,659 Dc_sensor3.2@2466,544
LED4: Dc_sensor4.2 Uexp.4 | length 2762.1
  1-TOP w25: Uexp.4@540,539 770,539 793,562 793,647 848,702 2967,702 Dc_sensor4.2@3121,548
LED5: Dc_sensor5.2 Uexp.5 | length 3813.4
  1-TOP w25: Uexp.5 739,589 761,611 761,671.25 877.75,788 3901,788 4125,564 Dc_sensor5.2@4125,549
LED6: Dc_sensor6.2 Uexp.6 | length 4564.1
  1-TOP w25: Uexp.6 721,639 726,644 726,695 857,826 3926,826 4065,687 4314,687 4457,544 4870,544 Dc_sensor6.2@4875,549
LED7: Dc_sensor7.2 Uexp.7 | length 5367
  1-TOP w25: Uexp.7 673,689 847,863 3945,863 4081,727 4323,727 4441,609 5251,609 5307,553 5698,553 Dc_sensor7.2@5702,549
LED8: Dc_sensor8.2 Uexp.8 | length 6091.8
  1-TOP w25: Uexp.8 673,739 834,900 3970,900 4102,768 4333,768 4454,647 5278,647 5320,605 6049,605 6112,542 Dc_sensor8.2@6414,542
MOSLED1: RvledN_sensor1.1 Uexp.21 VledN_sensor1.1 | length 1052.8
  1-TOP w25: Uexp.21@145,739 Uexp.21 387,739 412,714 v1@412,586
  4-BOTTOM w20: RvledN_sensor1.1@859,323 908.6,372.6 VledN_sensor1.1
  4-BOTTOM w25: v1(409,583) 579,583 RvledN_sensor1.1@838,324
MOSLED2: RvledN_sensor2.1 Uexp.22 VledN_sensor2.1 | length 1744.3
  1-TOP w25: Uexp.22 271,689 v1@320,640
  4-BOTTOM w20: RvledN_sensor2.1@1672.07,322.46 1720.21,370.6 VledN_sensor2.1
  4-BOTTOM w25: v1(315,642) 1219,642 1530,331 RvledN_sensor2.1@1660,331
MOSLED3: RvledN_sensor3.1 Uexp.23 VledN_sensor3.1 | length 2669.8
  1-TOP w25: Uexp.23@136,639 Uexp.23
  4-BOTTOM w20: RvledN_sensor3.1@2480.07,322.46 2528.21,370.6 VledN_sensor3.1
  4-BOTTOM w25: v1@120,643 167,690 1233,690 1333,590 1982,590 2250,322 RvledN_sensor3.1@2466,322
  other v1: 111,641
MOSLED4: RvledN_sensor4.1 Uexp.24 VledN_sensor4.1 | length 3551.9
  1-TOP w25: Uexp.24 316,589 455,450 v1@455,219
  3-SIGNAL w20: v1@465,216 v1@3204,216
  4-BOTTOM w20: v1@3220,214 3285.61,279.61 RvledN_sensor4.1 ; RvledN_sensor4.1@3286.61,320 3336.21,369.6 VledN_sensor4.1
  other v1: 3208.61,213 458,216
MOSLED5: RvledN_sensor5.1 Uexp.25 VledN_sensor5.1 | length 4320.7
  1-TOP w25: Uexp.25 295,539 407,427 v1@407,258
  3-SIGNAL w20: v1(405,253) v1@4095,253
  3-SIGNAL w25: v1@403,258 v1(405,253)
  4-BOTTOM w20: v1@4093.76,252.24 RvledN_sensor5.1 ; RvledN_sensor5.1@4094.76,319 4144.36,368.6 VledN_sensor5.1
  other v1: 4092.61,253
MOSLED6: RvledN_sensor6.1 Uexp.26 VledN_sensor6.1 | length 4969.7
  1-TOP w25: Uexp.26 286,489 357,418 v1@357,300
  3-SIGNAL w20: v1@363,290 v1@4896,290
  4-BOTTOM w20: RvledN_sensor6.1@4902.61,321 4952.21,370.6 VledN_sensor6.1
  other v1: 4901.61,290 358,302
MOSLED7: RvledN_sensor7.1 Uexp.27 VledN_sensor7.1 | length 5728.8
  1-TOP w25: Uexp.27 273,439 307,405 v1@307,347
  3-SIGNAL w20: v1@304,344 320,328 331.67,328 342.67,339 373.33,339 384.33,328 v1@5700,328
  3-SIGNAL w25: v1@5700,328 v1@5704,324
  4-BOTTOM w20: RvledN_sensor7.1@5707.61,319 5757.21,368.6 VledN_sensor7.1
  other v1: 5706.61,325 307,345
MOSLED8: RvledN_sensor8.1 Uexp.28 VledN_sensor8.1 | length 6114.8
  1-TOP w25: Uexp.28 v1@257,389
  3-SIGNAL w20: v1@272,382 281.84,372.16 291.67,382 322.33,382 338.33,366 384.51,366 385.51,367 6195,367 v1@6197,369
  4-BOTTOM w25: RvledN_sensor8.1@6230,358 6249.4,338.6 VledN_sensor8.1
  other v1: 6193,367 263,383
NetCapt_sensor1_2: Capt_sensor1.2 Pvled_sensor1.3 | length 130.3
  4-BOTTOM w20: Pvled_sensor1.3 948.6,209.4 Capt_sensor1.2@1000,158
NetCapt_sensor2_2: Capt_sensor2.2 Pvled_sensor2.3 | length 146.6
  4-BOTTOM w20: Pvled_sensor2.3 1760.21,205.79 Capt_sensor2.2@1822,144
NetCapt_sensor3_2: Capt_sensor3.2 Pvled_sensor3.3 | length 139.5
  4-BOTTOM w20: Pvled_sensor3.3 2568.21,198.79 Capt_sensor3.2@2620,147
NetCapt_sensor4_2: Capt_sensor4.2 Pvled_sensor4.3 | length 133.7
  4-BOTTOM w20: Pvled_sensor4.3 3376.21,207.79 Capt_sensor4.2@3431,153
NetCapt_sensor5_2: Capt_sensor5.2 Pvled_sensor5.3 | length 136.6
  4-BOTTOM w20: Pvled_sensor5.3 4184.36,203.64 Capt_sensor5.2@4237,151 ; Pvled_sensor5.3@4187,261 Pvled_sensor5.3@4189,263
NetCapt_sensor6_2: Capt_sensor6.2 Pvled_sensor6.3 | length 138.9
  4-BOTTOM w20: Pvled_sensor6.3@4992,265 Pvled_sensor6.3 4992.21,203.79 Capt_sensor6.2@5047,149
NetCapt_sensor7_2: Capt_sensor7.2 Pvled_sensor7.3 | length 137.9
  4-BOTTOM w20: Pvled_sensor7.3 5797.21,199.79 Capt_sensor7.2@5850,147
NetCapt_sensor8_2: Capt_sensor8.2 Pvled_sensor8.3 | length 133.4
  4-BOTTOM w20: Pvled_sensor8.3 6605.21,213.79 Capt_sensor8.2@6663,156 ; Pvled_sensor8.3@6609,263 Pvled_sensor8.3@6610,264
NetDc_sensor1_1: Dc_sensor1.1 Rdc_sensor1.2 | length 90.7
  1-TOP w25: Dc_sensor1.1@1028,544 Rdc_sensor1.2@1118.66,544
NetDc_sensor2_1: Dc_sensor2.1 Rdc_sensor2.2 | length 90.7
  1-TOP w25: Dc_sensor2.1 Rdc_sensor2.2@1828.61,545
NetDc_sensor3_1: Dc_sensor3.1 Rdc_sensor3.2 | length 90.7
  1-TOP w25: Dc_sensor3.1 Rdc_sensor3.2@2636.61,545
NetDc_sensor4_1: Dc_sensor4.1 Rdc_sensor4.2 | length 90.7
  1-TOP w25: Dc_sensor4.1 Rdc_sensor4.2@3296.61,545
NetDc_sensor5_1: Dc_sensor5.1 Rdc_sensor5.2 | length 108.8
  1-TOP w25: Dc_sensor5.1 4226,541 Rdc_sensor5.2@4291,606
NetDc_sensor6_1: Dc_sensor6.1 Rdc_sensor6.2 | length 90.7
  1-TOP w25: Dc_sensor6.1 Rdc_sensor6.2@5060.61,545
NetDc_sensor7_1: Dc_sensor7.1 Rdc_sensor7.2 | length 90.7
  1-TOP w25: Dc_sensor7.1 Rdc_sensor7.2@5865.61,543
NetDc_sensor8_1: Dc_sensor8.1 Rdc_sensor8.2 | length 149.2
  1-TOP w20: Rdc_sensor8.2 6452,470 6489,507 Dc_sensor8.1@6489,548
NetINPUT_2: INPUT.2 s5.2 | length 70.7
  4-BOTTOM w50: s5.2 1365,1017 INPUT.2@1369,1021
NetINPUT_3: INPUT.3 s28.2 | length 67.5
  4-BOTTOM w50: INPUT.3@1266,1022 1272,1016 s28.2
NetPvled_sensor1_1: Pvled_sensor1.1 RvledP_sensor1.2 VledN_sensor1.3 | length 204.2
  4-BOTTOM w20: Pvled_sensor1.1 1062.4,304.4 1107,349 1094,349 VledN_sensor1.3@1031,412
NetPvled_sensor2_1: Pvled_sensor2.1 RvledP_sensor2.2 VledN_sensor2.3 | length 204.2
  4-BOTTOM w20: Pvled_sensor2.1 1874.02,302.4 1918.61,347 1905.61,347 VledN_sensor2.3@1842.61,410
NetPvled_sensor3_1: Pvled_sensor3.1 RvledP_sensor3.2 VledN_sensor3.3 | length 204.2
  4-BOTTOM w20: Pvled_sensor3.1 2682.02,302.4 2726.61,347 2713.61,347 VledN_sensor3.3@2650.61,410
NetPvled_sensor4_1: Pvled_sensor4.1 RvledP_sensor4.2 VledN_sensor4.3 | length 204.2
  4-BOTTOM w20: Pvled_sensor4.1 3490.02,301.4 3534.61,346 3521.61,346 VledN_sensor4.3@3458.61,409
NetPvled_sensor5_1: Pvled_sensor5.1 RvledP_sensor5.2 VledN_sensor5.3 | length 204.2
  4-BOTTOM w20: Pvled_sensor5.1 4298.17,300.4 4342.76,345 4329.76,345 VledN_sensor5.3@4266.76,408
NetPvled_sensor6_1: Pvled_sensor6.1 RvledP_sensor6.2 VledN_sensor6.3 | length 204.2
  4-BOTTOM w20: Pvled_sensor6.1 5106.02,302.4 5150.61,347 5137.61,347 VledN_sensor6.3@5074.61,410
NetPvled_sensor7_1: Pvled_sensor7.1 RvledP_sensor7.2 VledN_sensor7.3 | length 204.2
  4-BOTTOM w20: Pvled_sensor7.1 5911.02,300.4 5955.61,345 5942.61,345 VledN_sensor7.3@5879.61,408
NetPvled_sensor8_1: Pvled_sensor8.1 RvledP_sensor8.2 VledN_sensor8.3 | length 420.5
  4-BOTTOM w20: Pvled_sensor8.1 6719.02,301.4 6763.61,346 RvledP_sensor8.2@6750.61,346
  4-BOTTOM w25: VledN_sensor8.3 6596,376 Pvled_sensor8.1@6668,304
NetsA0_2: sA0.2 U?.1 | length 216
  1-TOP w12: U?.1 3639.75,559.75 3659,579 3659,658 v1@3715,714
  other v1: 3715.61,715
NetsA1_2: sA1.2 U?.2 | length 140.9
  1-TOP w12: U?.2 3653.16,534.16 3716,597 v1@3716,605
  other v1: 3714.61,604
NetsA2_2: sA2.2 U?.21 | length 175.9
  1-TOP w12: v1@3732.98,482.98 U?.21
  4-BOTTOM w12: sA2.2@3713,468 sA2.2
  other v1: 3733,493
NetstA0_2: stA0.2 Uexp.15 | length 134.7
  1-TOP w25: Uexp.15 281,1039 v1@304,1062
  other v1: 306.61,1064
NetstA1_2: stA1.2 Uexp.16 | length 143.9
  1-TOP w25: Uexp.16 269,989 v1@307,951
  other v1: 306.61,954
NetstA2_2: stA2.2 Uexp.17 | length 180.5
  1-TOP w25: Uexp.17 236,939 302,873 v1@302,843
  other v1: 301.61,842
SCL1: Capt_sensor1.4 U?.5 | length 2924.3
  1-TOP w16: Capt_sensor1.4@809.5,156.5 1110.39,457.39 U?.5
SCL2: Capt_sensor2.4 U?.7 | length 2182
  1-TOP w16: Capt_sensor2.4@1621,156 1646,181 1646,335 1717.2,406.2 U?.7
SCL3: Capt_sensor3.4 U?.9 | length 1299.4
  1-TOP w16: Capt_sensor3.4@2429,152 2429,212 2572.02,355.02 U?.9
SCL4: Capt_sensor4.4 U?.11 | length 436.2
  1-TOP w12: Capt_sensor4.4@3235,154 3384.84,303.84 U?.11
SCL5: Capt_sensor5.4 U?.14 | length 274.2
  1-TOP w12: U?.14 3969.16,303.84 4044,229 Capt_sensor5.4@4044,149
SCL6: Capt_sensor6.4 U?.16 | length 1055.8
  1-TOP w16: U?.16 4645.98,355.02 Capt_sensor6.4@4851.5,149.5
SCL7: Capt_sensor7.4 U?.18 | length 1885.5
  1-TOP w16: U?.18 5406.8,406.2 Capt_sensor7.4@5661,152
SCL8: Capt_sensor8.4 U?.20 | length 2719.2
  1-TOP w16: U?.20 6159.61,457.39 Capt_sensor8.4@6471,146
SDA1: Capt_sensor1.6 U?.4 | length 3134.3
  1-TOP w16: Capt_sensor1.6@612,152 709,249 765,249 998.98,482.98 U?.4
SDA2: Capt_sensor2.6 U?.6 | length 2329.9
  1-TOP w16: Capt_sensor2.6@1420,157 1420,203 1648.8,431.8 U?.6
SDA3: Capt_sensor3.6 U?.8 | length 1519.2
  1-TOP w16: Capt_sensor3.6@2227,153 2227,226 2381.61,380.61 U?.8
SDA4: Capt_sensor4.6 U?.10 | length 639.1
  1-TOP w12: Capt_sensor4.6@3044,151 3222.43,329.43 U?.10
SDA5: Capt_sensor5.6 U?.13 | length 185.8
  1-TOP w12: Capt_sensor5.6@3841,139 3836.25,143.75 3836.25,278.25 U?.13
SDA6: Capt_sensor6.6 U?.15 | length 849.4
  1-TOP w16: U?.15 4466.57,329.43 Capt_sensor6.6@4653,143
SDA7: Capt_sensor7.6 U?.17 | length 1681.8
  1-TOP w16: U?.17 5229.39,380.61 Capt_sensor7.6@5465,145
SDA8: Capt_sensor8.6 U?.19 | length 2505.5
  1-TOP w16: U?.19 5435.2,431.8 5503,364 5984,364 6066,282 6139,282 Capt_sensor8.6@6270,151
pads on no net: Uexp.11 Uexp.14 Uexp.19 Uexp.20

## Polygon pours and split planes (outlines as drawn)
GND on 3-SIGNAL "3-GND" (solid, pour order 5): 6895,1183 6895,-41 -24.38,-38.52 -33,1183
GND on 2-GND "2-GND" (solid, pour order 6): 6887,1176 6887,-41 -24.39,-38.54 -33,1176
GND on 1-TOP "1-GND" (solid, pour order 7): 6887,1186 6887,-41 -24.39,-38.52 -33,1186
GND on 4-BOTTOM "4-BOTTOM-GND" (solid, pour order 8): 6891,1176 6891,-41 -24.39,-38.54 -33,1176

## Keep-outs
Keep-Out Layer:
  the board outline again, w39.37

## Silkscreen, mask and mechanical layers (free items; w line width, h text height)
Top Overlay:
  lines w10: 4470,40 4470,1114 ; 5290,30 5290,1104 ; 6105,17 6105,1091
  text "MCP23017" at 170,1090 h40
  text "1M   #" at 6560,1078 h40
  text "100k *" at 6560,1012 h40
  text "D-" at 5451,1005 h40
  text "1k   -" at 6560,944 h40
  text "ROBOT ESEO 2018" at 2448,940 h80
  text "D+" at 5452,907 h40
  text "100  ." at 6560,880 h40
  text "Sensor_Expander" at 2448,855 h80
  text "GND" at 1640,810 h40
  text "5V" at 1810,810 h40
  text "12V" at 5453,799 h40
  text "°" at 6750,790 h30
  text "GND" at 895,781 h40 r90
  text "SDA" at 995,781 h40 r90
  text "SCL" at 1185,781 h40 r90
  text "5V" at 1385,781 h40 r90
  text "Rst" at 1090,780 h40 r90
  text "2V8" at 1290,780 h40 r90
  text "100n" at 6560,780 h40
  text "GND" at 1485,771 h40 r90
  text "Nirgal" at 2452,768 h80
  text "°" at 610,720 h30
  text "GND_12" at 5452,704 h40
  text "cut here" at 6080,660 h40 r90
  text "--AX12--" at 4317,646 h40 r90
  text "----RX24----" at 4371,643 h40 r90
  text "TCA9548A" at 3460,630 h40
  text "°" at 3940,630 h30
  text "if u're crazy" at 6180,610 h40 r90
  text "-" at 4360,550 h40 r90
  text "-" at 1210,530 h40 r90
  text "-" at 1900,530 h40 r90
  text "-" at 2720,530 h40 r90
  text "-" at 3380,530 h40 r90
  text "-" at 5140,530 h40 r90
  text "-" at 5950,530 h40 r90
  text "-" at 6360,460 h40 r90
  text "0" at 800,300 h120
  text "1" at 1600,300 h120
  text "2" at 2400,300 h120
  text "3" at 3200,300 h120
  text "4" at 4000,300 h120
  text "5" at 4850,300 h120
  text "6" at 5750,300 h120
  text "7" at 6450,300 h120
  text "or here" at 4520,280 h40 r90
  text "or here" at 5340,280 h40 r90
Bottom Overlay:
  text "10n" at 2220,1090 h40
  text "A0" at 150,1030 h40
  text "+" at 1980,1010 h40 r180
  text "D-" at 5416,1006 h40
  text "Dz5V1" at 1920,940 h40 r90
  text "ROBOT ESEO 2018" at 3498,940 h80
  text "A1" at 150,930 h40
  text "2k" at 920,910 h40 r90
  text "2k" at 1110,910 h40 r90
  text "D+" at 5417,908 h40
  text "Sensor_Expander" at 3498,858 h80
  text "! voir" at 3850,850 h40
  text "4.7u" at 2460,830 h40 r270
  text "A2" at 150,820 h40
  text "12V" at 5444,801 h40
  text "schema !" at 480,800 h40 r270
  text "! voir" at 540,800 h40 r270
  text "Reg2V8" at 2320,800 h40
  text "schema !" at 3850,790 h40
  text "Nirgal" at 3497,783 h80
  text "5V" at 1340,780 h40 r270
  text "2V8" at 1250,740 h40 r270
  text "'0'" at 430,730 h40
  text "'1'" at 250,720 h40
  text "GND_12" at 5563,706 h40
  text "A0" at 3950,700 h40
  text "schema !" at 1430,690 h40 r270
  text "! voir" at 1490,690 h40 r270
  text "A1" at 3940,610 h40
  text "2" at 170,590 h40
  text "1" at 280,590 h40
  text "0" at 450,510 h40
  text "NMOS" at 1040,490 h40
  text "NMOS" at 1870,490 h40
  text "NMOS" at 2670,490 h40
  text "NMOS" at 3480,480 h40
  text "A2" at 3940,480 h40
  text "NMOS" at 4290,480 h40
  text "NMOS" at 5110,480 h40
  text "NMOS" at 5910,480 h40
  text "MOSFET" at 370,470 h40
  text "NMOS" at 6420,460 h40
  text "7" at 300,390 h40
  text "'1'" at 3650,380 h40
  text "'0'" at 3840,380 h40
  text "+" at 866,366 h40
  text "+" at 2486,366 h40
  text "+" at 3296,366 h40
  text "+" at 4916,366 h40
  text "+" at 5716,366 h40
  text "+" at 1686,356 h40
  text "+" at 4106,356 h40
  text "6" at 360,350 h40
  text "PMOS" at 6570,350 h40 r90
  text "5" at 410,300 h40
  text "+" at 6236,276 h40
  text "+" at 1130,270 h40
  text "+" at 2750,270 h40
  text "+" at 3560,270 h40
  text "+" at 1936,266 h40
  text "+" at 4366,266 h40
  text "+" at 5166,266 h40
  text "+" at 5976,266 h40
  text "+" at 6786,266 h40
  text "4" at 460,250 h40
  text "0" at 700,250 h120
  text "1" at 1500,250 h120
  text "2" at 2300,250 h120
  text "3" at 3100,250 h120
  text "4" at 4000,250 h120
  text "5" at 4750,250 h120
  text "6" at 5550,250 h120
  text "7" at 6500,250 h120
  text "PMOS" at 900,220 h40
  text "PMOS" at 1720,220 h40
  text "3" at 510,200 h40
  text "PMOS" at 2540,200 h40
  text "PMOS" at 3360,200 h40
  text "PMOS" at 4160,200 h40
  text "PMOS" at 4970,200 h40
  text "PMOS" at 5770,200 h40

## Dimensions
6889.76,0 to 3937.01,0 on Mechanical 15